# Altium PCB RADIOMASTER.PcbDoc
Units mm, origin at the board's own origin, x right, y up, seen from the top; angles counter-clockwise.
Board outline 22.82 x 52.44 mm, 2 copper layers (Top Layer, Bottom Layer); 23 components, 30 nets, 87 pads, 18 vias.
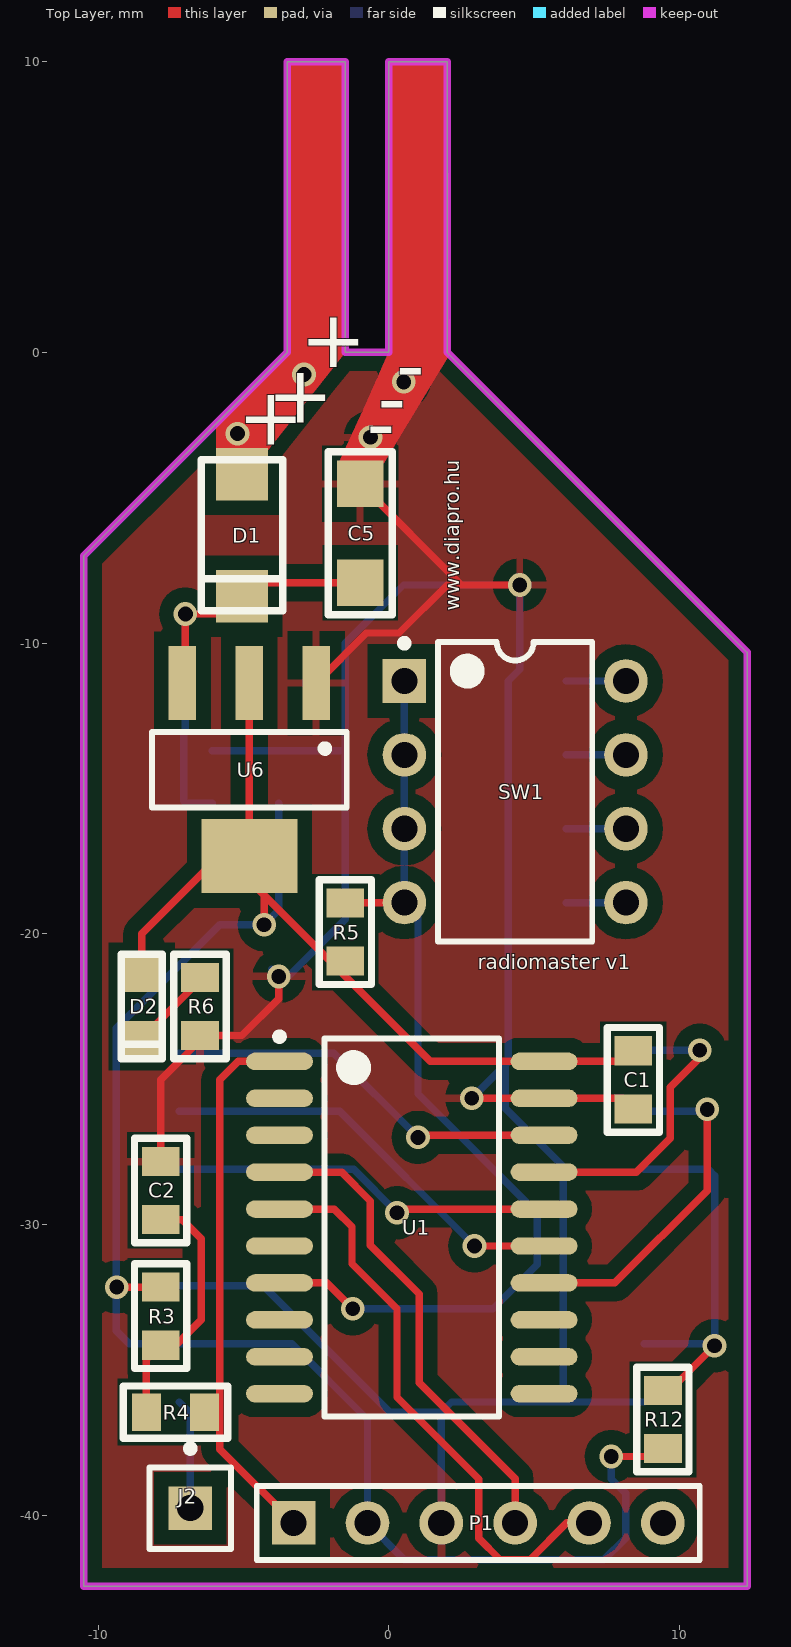
[diagram p0: Top Layer view]
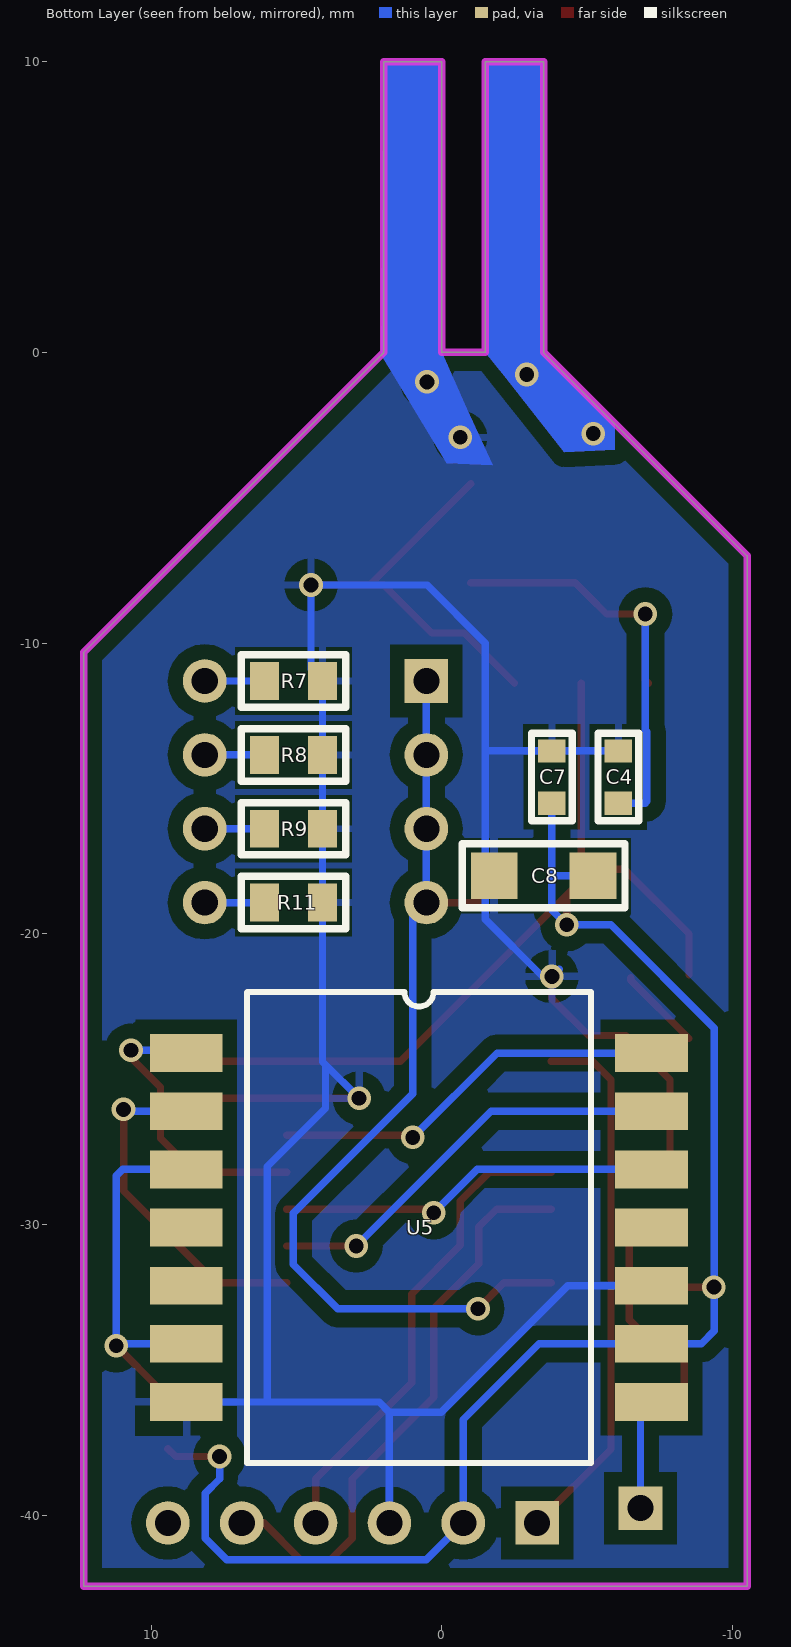
[diagram p1: Bottom Layer view, seen from below]
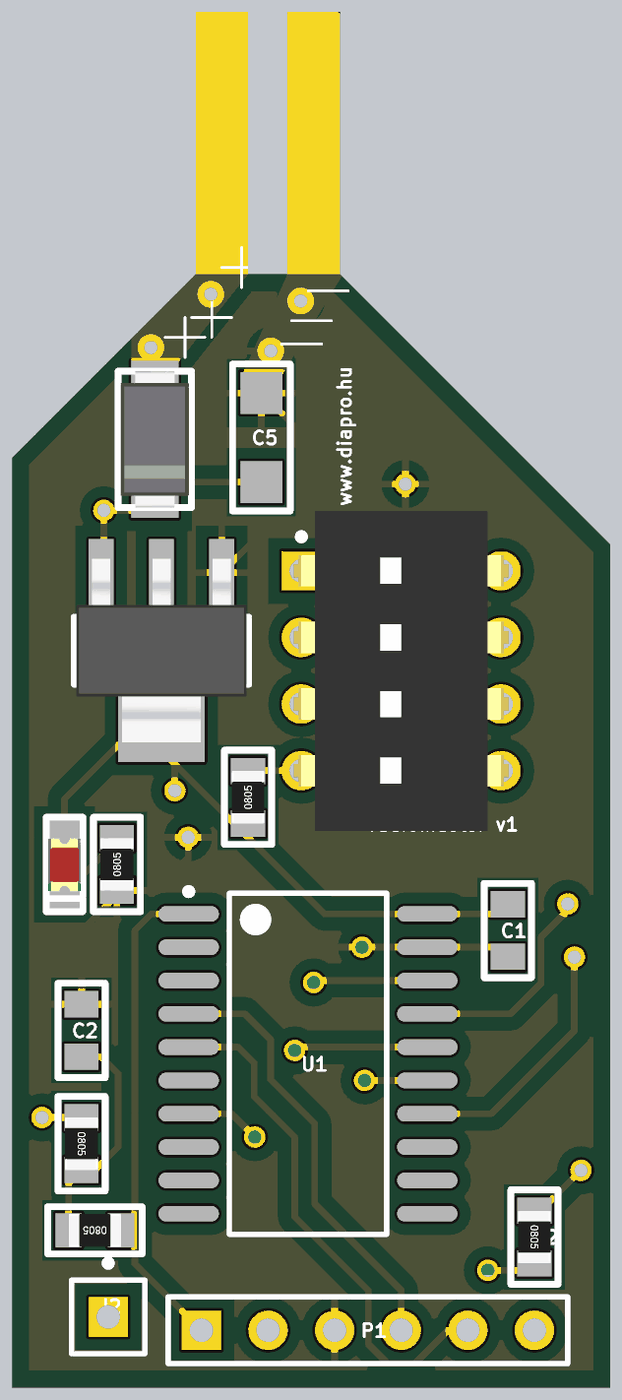
[diagram p2: 3D render of the assembled board from above, using the file's embedded part models]
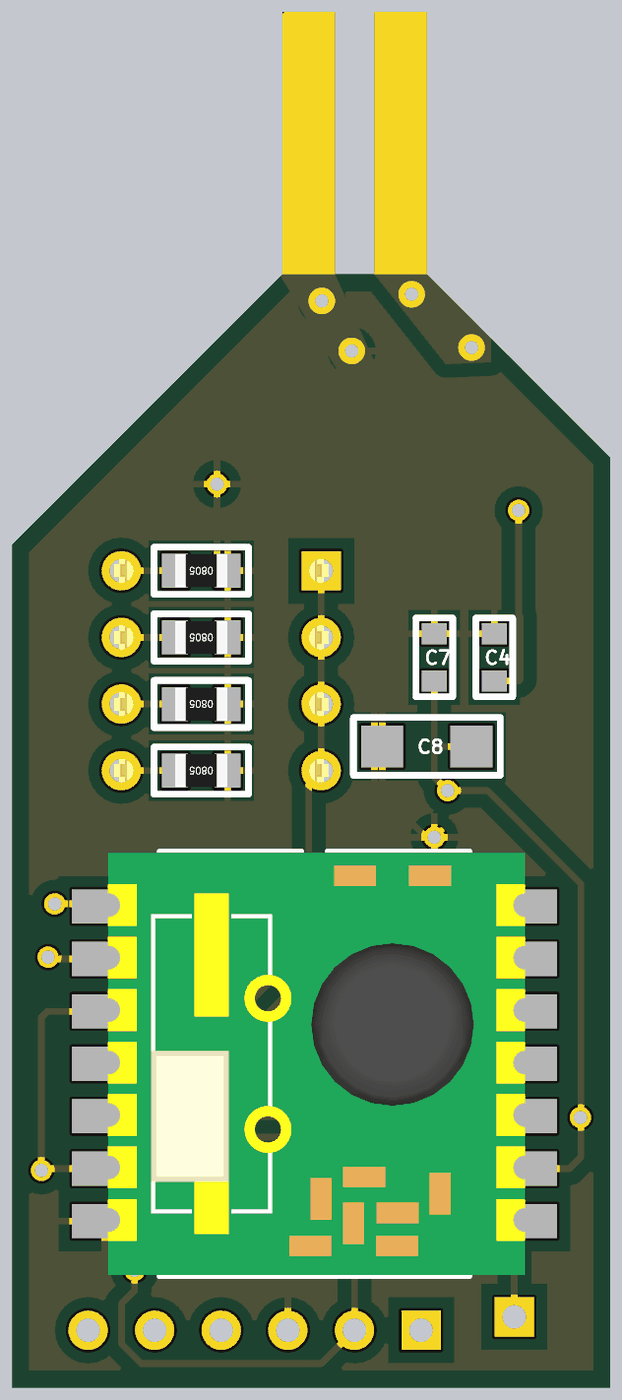
[diagram p3: 3D render of the assembled board from below, using the file's embedded part models]

## Layer stack, top to bottom
Top Layer: signal copper 0.0356
Dielectric: dielectric 0.32, FR-4, Dk 4.8
Bottom Layer: signal copper 0.0356

## Board outline
-10.5,-42.442 -10.5,-7 -3.5,0 -3.5,10 -1.5,10 -1.5,0 0,0 0,10 2,10 2,0 12.319,-10.319 12.319,-42.442

## Design rules (kind name [scope] priority, off if disabled: settings)
Clearance Clearance_to_polygon [All vs (InNamedPolygon('Bottom GND'))  or (InNamedPolygon('Top GND'))] p1: gap=0.508
Clearance [All] p2: gap=0.381
PolygonConnect [All] p1: connectstyle=Relief reliefconductorwidth=0.254 reliefentries=4 polygonreliefangle="90 Angle"
RoutingVias [All] p1: holewidth=0.508 width=0.813 viastyle="Through Hole" minholewidth=0.508 minwidth=0.813 maxholewidth=0.711 maxwidth=1.27
SilkToSilkClearance [All] p1: silktosilkclearance=0
SilkscreenOverComponentPads [All] p1: minsilkscreentomaskgap=0
SolderMaskExpansion [All] p1: expansion=0.102
Width [All] p1: maxlimit=1.524 minlimit=0.254 preferedwidth=0.254
26 further rules are at their usual default settings.

## Components (designator, comment, footprint, x,y, rotation, side; value= is the part's Value field where it differs from the comment)
C1 "100nF" FP_0805_CAP_060 8.406,-25.02 r90 top
C2 "100nF" FP_0805_CAP_060 -7.85,-28.83 r270 top
C4 "100nF" FP_0603_CAP_080 -6.072,-14.606 r270 bottom
C5 "10uF" FP_1206_CAP_085 -0.992,-6.224 r90 top
C7 "100nF" FP_0603_CAP_080 -3.786,-14.606 r90 bottom
C8 "10uF" FP_1206_CAP_085 -3.5,-18 r180 bottom
D1 "DIODE_big" "FP_SMA DO214AC" -5.056,-4.192 r270 top
D2 "LED_RED" FP_0805_LED_RED -8.5,-21.5 r270 top
J2 "ANT" PIN1 -6.834,-39.752 r0 top
P1 "Header 6" HDR1X6 -3.278,-40.26 r0 top
R3 "10K" FP_0805_RES -7.85,-33.148 r270 top
R4 "100R" FP_0805_RES -7.342,-36.45 r180 top
R5 "10k" FP_0805_RES -1.5,-19.94 r90 top
R6 "270R" FP_0805_RES -6.5,-22.5 r90 top
R7 "10k" FP_0805_RES 5.104,-11.304 r0 bottom
R8 "10k" FP_0805_RES 5.104,-13.844 r0 bottom
R9 "10k" FP_0805_RES 5.104,-16.384 r0 bottom
R11 "10k" FP_0805_RES 5.104,-18.924 r0 bottom
R12 "10k" FP_0805_RES 9.422,-36.704 r270 top
SW1 "DIPSW4" "DIP switch 4 TH" 4.342,-15.114 r0 top
U1 "PIC24F16KA101-I/SO" SOIC-SO20_N 0.786,-30.1 r0 top
U5 "RFM12B" RFM12B-S1 0.786,-30.1 r180 bottom
U6 "LD1117xx" SUPPLY_SOT223 -4.802,-14.352 r270 top

## Footprints (in the part's own frame and the unit in brackets; to place one, negate y for a bottom-side part, rotate by r counter-clockwise, add the part's x,y. Pads: shape width x height; smd on the part's side, far side on the other; paste and mask are expansions set on the pad)
"DIP switch 4 TH" [mm]
  rect 1.5x1.5 hole 0.9: 1(-3.81,3.81)
  round 1.5 hole 0.9: 2(-3.81,1.27) 3(-3.81,-1.27) 4(-3.81,-3.81) 5(3.81,-3.81) 6(3.81,-1.27) 7(3.81,1.27) 8(3.81,3.81)
  silkscreen extent -3.93,-5.15 2.65,5.23, body extent -4.1,-6.1 4.1,6.1, height 5
FP_0603_CAP_080 [mm] "0.8mm magas 0603 kapacitás"
  rect 0.8x0.95 smd: 1(-0.9,0) 2(0.9,0)
  silkscreen extent -1.5,-0.7 1.5,0.7, body extent -0.8,-0.4 0.76,0.4, height 0.8
FP_0805_CAP_060 [mm] "0805 kapacitás YAGEO 0.6 mm magas"
  rect 1x1.3 smd: 1(-1,0) 2(1,0)
  silkscreen extent -1.8,-0.9 1.8,0.9, body extent -1,-0.64 1.03,0.64, height 0.6
FP_0805_LED_RED [mm] "0805 méretû piros LED"
  rect 1.2x1.3 smd: A(-0.1,0) K(2.1,0)
  silkscreen extent -0.8,-0.7 2.8,0.7, body extent 0.01,-0.63 2.03,0.62, height 1.1
FP_0805_RES [mm] "0805 ellenállás"
  rect 1x1.3 smd: 1(-1,0) 2(1,0)
  silkscreen extent -1.8,-0.9 1.8,0.9, body extent -1,-0.62 1,0.63, height 0.62
FP_1206_CAP_085 [mm] "1206 kapacitás 0.85 mm"
  rect 1.6x1.6 smd: 1(-1.7,0) 2(1.7,0)
  silkscreen extent -2.8,-1.1 2.8,1.1, body extent -1.52,-0.79 1.58,0.79, height 0.85
"FP_SMA DO214AC" [mm] "SMA DO-214AC tok"
  rect 1.8x1.8 smd: A(0,0) K(4.2,0)
  silkscreen extent -0.5,-1.4 4.7,1.4, body extent -0.5,-1.3 4.7,1.3, height 2.42
HDR1X6 [mm] "Connector; Header; 6 Position"
  rect 1.5x1.5 hole 0.9: 1(0,0)
  round 1.5 hole 0.9: 2(2.54,0) 3(5.08,0) 4(7.62,0) 5(10.16,0) 6(12.7,0)
  silkscreen extent -1.27,-1.27 13.97,1.27
PIN1 [mm] "Connector; Plug"
  rect 1.5x1.5 hole 0.9: 1(0,0)
  silkscreen extent -1.4,-1.4 1.4,2.17
RFM12B-S1 [mm]
  rect 2.5x1.3 smd: 1(-8,6) 2(-8,4) 3(-8,2) 4(-8,0) 5(-8,-2) 6(-8,-4) 7(-8,-6) 8(8,-6) 9(8,-4) 10(8,-2) 11(8,0) 12(8,2) 13(8,4) 14(8,6)
  silkscreen extent -5.91,-8.1 5.92,8.1, body extent -7.88,-8.05 8.04,8.05, height 2.1
SOIC-SO20_N [mm] "SOIC, 20-Leads, Body 12.8x7.5mm, Pitch 1.27mm, IPC Medium Density"
  oval 2.3x0.6 smd: 1(-4.55,5.715) 2(-4.55,4.445) 3(-4.55,3.175) 4(-4.55,1.905) 5(-4.55,0.635) 6(-4.55,-0.635) 7(-4.55,-1.905) 8(-4.55,-3.175) 9(-4.55,-4.445) 10(-4.55,-5.715) 11(4.55,-5.715) 12(4.55,-4.445) 13(4.55,-3.175) 14(4.55,-1.905) 15(4.55,-0.635) 16(4.55,0.635) 17(4.55,1.905) 18(4.55,3.175) 19(4.55,4.445) 20(4.55,5.715)
  silkscreen extent -4.67,-6.5 3,6.69, body extent -3.75,-6.5 3.75,6.5, height 2.65
SUPPLY_SOT223 [mm] "SOT223 package, 3 leads"
  rect 2.55x0.95 smd: 1(-2.975,2.3) 2(-2.975,0) 3(-2.975,-2.3)
  rect 2.55x3.3 smd: 2(2.975,0)
  silkscreen extent -1.3,-3.35 1.3,3.35, body extent -3.5,-3.25 3.5,3.25, height 1.65

## Part data
C1 C2 C4 C5 C7 C8: library part Cap, "Capacitor"
D2: library part LED_R, "Typical LED"
J2: library part Socket, "Socket"
P1: "Header, 6-Pin"
R3 R4 R5 R6 R7 R8 R9 R11 R12: library part Res3, "Resistor"
U1: "16-Bit Flash Microcontroller with nanoWatt XLP Technology, 16KB Flash, 1.5KB SRAM, 20-Pin SOIC, Industrial Temperature"
U5: "FM Module"
U6: "LD1117xx 3,3V lin reg"

## Via types
v1: diameter 0.813, hole 0.508, Top Layer to Bottom Layer, 18 vias

## Nets (pads, with @x,y where several pads share a name; then routed paths per layer and width w, separated by ;. In a path a pad name is that pad's centre, name@x,y a point inside that pad or via, vN(x,y) a via of type N, cw(c..) or ccw(c..) an arc to the next point about the centre after c; other vN are vias at no path point)
+++: D1.A
  other v1: -5.207,-2.794 -2.921,-0.762
---: C1.1 C2.1 C4.1 C5.2 C7.2 C8.1 P1.3 R6.1 R7.1 R8.1 R9.1 R11.1 U1.19 U5.7 U5.10 U6.1 | length 106.7
  Top Layer w0.254: C2.1 -7.85,-25.02 -6.326,-23.496 -5.056,-23.496 -3.786,-22.226 v1(-3.786,-21.464) ; U6.1 -0.777,-9.652 0.348,-9.652 2,-8 v1(4.5,-8) 2.484,-8 C5.2 ; v1(2.845,-25.655) U1.19 8.041,-25.655 C1.1
  Bottom Layer w0.254: U5.10 -4.326,-32.1 0.024,-36.45 1.802,-36.45 ; C4.1 C7.2 -1.5,-13.706 ; v1@-4.04,-21.21 v1(-3.786,-21.464) -3.464,-21.464 -1.5,-19.5 -1.5,-10 0.5,-8 v1(4.5,-8) 4.5,-10.908 R7.1 R8.1 R9.1 R11.1 4.104,-24.396 4,-24.5 ; P1.3 1.802,-36.45 ; v1(2.845,-25.655) 4,-24.5 ; U5.7 6,-36.1 ; 1.802,-36.45 2.152,-36.1 6,-36.1 ; 4,-24.5 4,-26 6,-28 6,-36.1
  other v1: -0.635,-2.921 0.508,-1.016
AN0: U1.2
AN1: U1.3
AN2: R5.2 SW1.1 SW1.2 SW1.3 SW1.4 U1.7 | length 33.8
  Top Layer w0.254: U1.7 -2.135,-32.005 v1(-1.246,-32.894) ; R5.2@-1.484,-18.924 SW1.4
  Bottom Layer w0.254: v1(-1.246,-32.894) 3.58,-32.894 5.104,-31.37 5.104,-29.604 1,-25.5 1,-19.392 SW1.4 SW1.3 SW1.2 SW1.1
AN2/PGD1: P1.4 U1.4 | length 16.7
  Top Layer w0.254: U1.4 -1.627,-28.195 -0.636,-29.186 -0.636,-30.71 1.04,-32.386 1.04,-35.434 4.342,-38.736 P1.4
GPIO0: U1.11
GPIO1: U1.9
GPIO2: U1.10
GPIO3: U1.6
GPIO4/PGC1: P1.5 U1.5 | length 19.9
  Top Layer w0.254: U1.5 -1.881,-29.465 -1.271,-30.075 -1.271,-31.345 0.278,-32.894 0.278,-35.942 3.084,-38.748 3.084,-40.781 3.821,-41.518 4.863,-41.518 6.121,-40.26 P1.5
GPIO5: U1.8
M\C\L\R\: P1.1 R4.1 U1.1 | length 18.6
  Top Layer w0.254: U1.1 -5.183,-24.385 -5.818,-25.02 -5.818,-37.72 P1.1
MISO: U1.17 U5.1 | length 10.2
  Top Layer w0.254: U1.17 8.508,-28.195 9.676,-27.027 9.676,-25.274 10.692,-24.258 v1(10.692,-24.004)
  Bottom Layer w0.254: U5.1 8.882,-24.004 v1(10.692,-24.004)
MOSI: U1.16 U5.12 | length 13.2
  Top Layer w0.254: v1(0.278,-29.592) 0.405,-29.465 U1.16
  Bottom Layer w0.254: U5.12 -1.214,-28.1 v1(0.278,-29.592)
NetC2_2: C2.2 R3.2 R4.2 | length 8.7
  Top Layer w0.254: R4.2 -8.342,-34.64 R3.2 -7.326,-34.148 -6.453,-33.275 -6.453,-30.481 -7.104,-29.83 C2.2
NetD2_K: D2.K R6.2 | length 2.9
  Top Layer w0.254: D2.K -6.5,-21.6 R6.2
NetJ2_1: J2.1 U5.8 | length 3.8
  Bottom Layer w0.254: U5.8 -6.834,-36.48 J2.1
NetR7_2: R7.2 SW1.8 | length 2
  Bottom Layer w0.254: R7.2 SW1.8
NetR8_2: R8.2 SW1.7 | length 2
  Bottom Layer w0.254: R8.2 SW1.7
NetR9_2: R9.2 SW1.6 | length 2
  Bottom Layer w0.254: R9.2 SW1.6
NetR11_2: R11.2 SW1.5 | length 2
  Bottom Layer w0.254: R11.2 SW1.5
NetR12_1: R12.1 U5.3 U5.6 | length 13.2
  Top Layer w0.254: R12.1 9.66,-35.704 v1(11.2,-34.164)
  Bottom Layer w0.254: U5.6 11.136,-34.1 v1(11.2,-34.164) 11.2,-28.322 10.978,-28.1 U5.3
"RF I\R\Q\": U1.14 U5.2 | length 11.9
  Top Layer w0.254: U1.14 7.771,-32.005 10.946,-28.83 v1(10.946,-26.036)
  Bottom Layer w0.254: U5.2 10.882,-26.1 v1(10.946,-26.036)
"RF S\S\": U1.18 U5.14 | length 13.8
  Top Layer w0.254: v1(1,-27) 1.075,-26.925 U1.18
  Bottom Layer w0.254: U5.14 -1.9,-24.1 v1(1,-27)
SCK: U1.15 U5.13 | length 14.5
  Top Layer w0.254: v1(2.945,-30.735) U1.15
  Bottom Layer w0.254: U5.13 -1.69,-26.1 v1(2.945,-30.735)
SCL: U1.12
SDA: U1.13
VCC3.3V: C1.2 C7.1 C8.2 D2.A P1.2 R3.1 R5.1 R12.2 U1.20 U5.9 U6.2 | length 82.5
  Top Layer w0.254: v1(-9.358,-32.148) R3.1 R3.1@-7.596,-32.148 ; D2.A -8.5,-20 -6.28,-17.78 U6.2@-5.842,-17.78 ; U6.2@-4.802,-18.162 U6.2@-4.802,-17.327 ; U6.2@-4.802,-11.377 U6.2@-4.802,-17.327 ; v1(-4.294,-19.686) -4.294,-18.67 ; v1(7.644,-37.974) 9.152,-37.974 R12.2 ; C1.2 8.041,-24.385 U1.20 1.421,-24.385 -5.219,-17.745 U6.2@-4.802,-17.327
  Bottom Layer w0.254: C8.2 -3.786,-18 ; C7.1 -3.786,-18 ; v1(7.644,-37.974) 7.644,-38.747 8.14,-39.243 8.14,-40.781 7.391,-41.53 0.532,-41.53 P1.2 -0.738,-36.704 -3.342,-34.1 U5.9 -8.93,-34.1 -9.374,-33.656 -9.374,-23.242 -5.818,-19.686 v1(-4.294,-19.686) -3.786,-19.178 -3.786,-18
VCC_13V: C4.2 C5.1 D1.K U6.3 | length 16.3
  Top Layer w0.254: U6.3 -7,-11.275 v1(-7,-9) -5.664,-9 D1.K -4.588,-7.924 C5.1
  Bottom Layer w0.254: v1(-7,-9) -7,-12.986 -7.055,-13.041 -7.055,-15.445 -6.994,-15.506 C4.2
pads on no net: P1.6 U5.4 U5.5 U5.11

## Polygon pours and split planes (outlines as drawn)
--- on Top Layer "Top GND" (solid, pour order 4): -10.5,-42.418 12.319,-42.418 12.319,-10.319 2.076,-0.076 2,0 -3.5,0 -10.485,-6.985
--- on Bottom Layer "Bottom GND" (solid, pour order 6): -10.287,-42.442 -10.263,-42.418 12.319,-42.418 12.319,-10.319 2.076,-0.076 2,0 -3.5,0 -10.485,-6.985

## Keep-outs
Keep-Out Layer:
  the board outline again, w0.254

## Other copper
Top Layer:
  region net ---: -1.753,-3.886 -0.864,-1.93 0,0 0,10 1.931,10 2,9.931 2.076,-0.076 -0.178,-3.81
  region net +++: -4.216,-3.429 -2.21,-0.889 -1.5,0 -1.5,10 -3.5,10 -3.5,0 -5.944,-2.444 -5.944,-3.353
Bottom Layer:
  region net ---: -1.753,-3.886 -0.864,-1.93 0,0 0,10 1.931,10 2,9.931 2.076,-0.076 -0.178,-3.81
  region net +++: -4.216,-3.429 -2.21,-0.889 -1.5,0 -1.5,10 -3.5,10 -3.5,0 -5.944,-2.444 -5.944,-3.353

## Silkscreen, mask and mechanical layers (free items; w line width, h text height)
Top Overlay:
  text "+" at -3.048,-0.508 h2
  text "-" at 0.254,-1.397 h2
  text "+" at -4.191,-2.413 h2
  text "-" at -0.381,-2.54 h2
  text "+" at -5.207,-3.175 h2
  text "-" at -0.762,-3.424 h2
  text "www.diapro.hu" at 2.413,-8.89 h0.5 r90
  text "radiomaster v1" at 3.048,-21.209 h0.5
Top Solder:
  rectangle: -3.5,0 -1.5,10
  rectangle: 0,0 2,10
Bottom Solder:
  rectangle: 0,0 2,10
  rectangle: -3.5,0 -1.5,10